# Altium PCB PCB1.PcbDoc
Units mm, origin at the board's own origin, x right, y up, seen from the top; angles counter-clockwise.
Board outline 60 x 25 mm, 2 copper layers (Top Layer, Bottom Layer); 11 components, 6 nets, 39 pads, 15 vias.
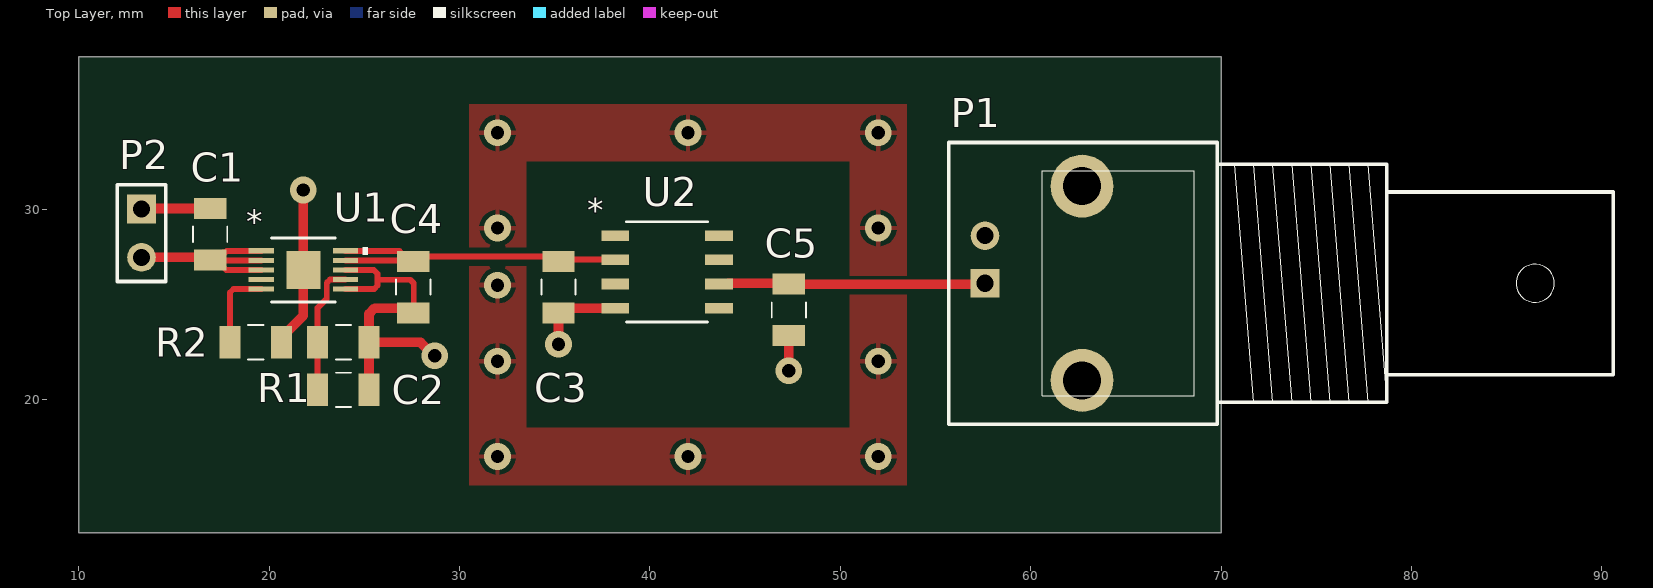
[diagram p0: Top Layer view]
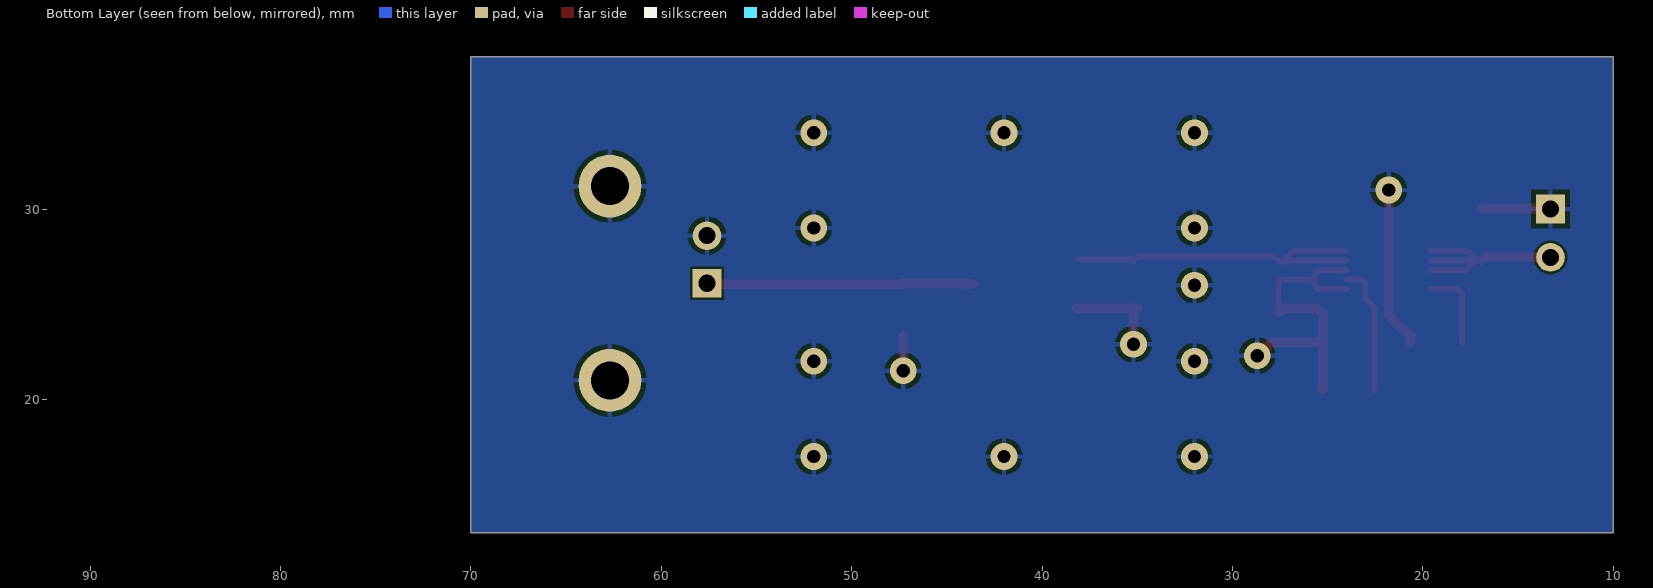
[diagram p1: Bottom Layer view, seen from below]
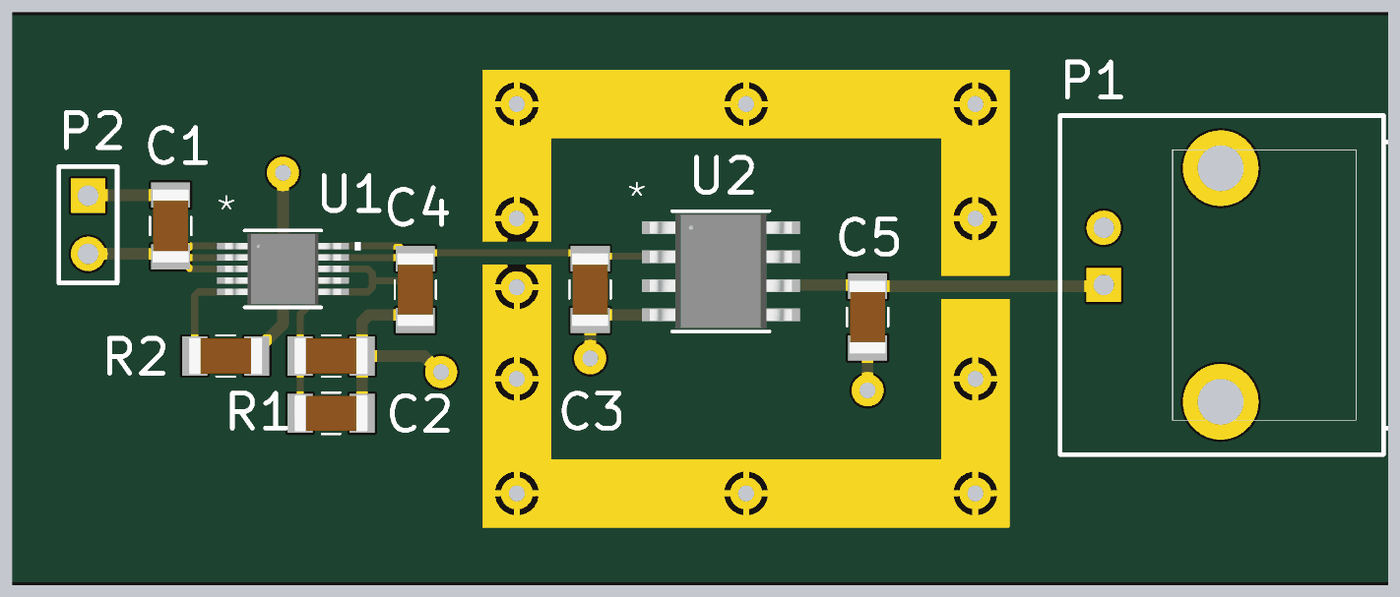
[diagram p2: 3D render of the assembled board from above, using the file's embedded part models]

## Layer stack, top to bottom
Top Solder: solder mask 0.0102, Solder Resist, Dk 3.5
Top Layer: signal copper 0.0356
Dielectric 1: dielectric 0.32, FR-4, Dk 4.8
Bottom Layer: signal copper 0.0356
Bottom Solder: solder mask 0.0102, Solder Resist, Dk 3.5

## Board outline
10,13 70,13 70,38 10,38

## Design rules (kind name [scope] priority, off if disabled: settings)
Clearance [All] p1: gap=0.127 ignorepadtopadclearanceinfootprint=TRUE
PolygonConnect [All] p1: connectstyle=Relief reliefconductorwidth=0.254 reliefentries=4 polygonreliefangle="90 Angle" airgapwidth=0.254
RoutingVias [All] p1: holewidth=0.7 width=1.4 viastyle="Through Hole" minholewidth=0.3 minwidth=0.6 maxholewidth=0.7 maxwidth=1.4
SolderMaskExpansion [All] p1: expansion=0.102 istentingtop=FALSE
Width [All] p1: maxlimit=1.016 minlimit=0.254 preferedwidth=0.305
30 further rules are at their usual default settings.

## Components (designator, comment, footprint, x,y, rotation, side; value= is the part's Value field where it differs from the comment)
C1 "10uF" C1206-KUE 16.9,28.675 r270 top
C2 "4.7uF" C1206-KUE 23.9,23 r180 top
C3 "10uF" C1206-KUE 35.2,25.9 r90 top
C4 "100nF" C1206-KUE 27.575,25.9 r90 top
C5 "100nF" C1206-KUE 47.3,24.7 r90 top
P1 "BNC" "BNC_RA CON" 57.6,26.1 r180 top
P2 "Header 2" HDR1X2 13.3,30 r270 top
R1 "50k" C1206-KUE 23.9,20.5 r0 top
R2 "0" C1206-KUE 19.3,23 r0 top
U1 "LT3042EMSE#TRPBF" 05-08-1664_ADI 21.8,26.8 r0 top
U2 "ADR4540BRZ" R-8_ADI 40.9,26.7 r0 top

## Footprints (in the part's own frame and the unit in brackets; to place one, negate y for a bottom-side part, rotate by r counter-clockwise, add the part's x,y. Pads: shape width x height; smd on the part's side, far side on the other; paste and mask are expansions set on the pad)
05-08-1664_ADI [mil]
  rect 52.28x11 smd paste+0 mask+0: 1(-87.14,39.37) 2(-87.14,19.68) 3(-87.14,0) 4(-87.14,-19.69) 5(-87.14,-39.37) 6(87.14,-39.37) 7(87.14,-19.69) 8(87.14,0) 9(87.14,19.68) 10(87.14,39.37)
  rect 70x78 smd paste+0 mask+0: 11(0,0)
  silkscreen extent -66,-66 133,66, body extent -99,-61 99,61, height 43
"BNC_RA CON" [mm] "Connector; BNC Elbow"
  rect 1.5x1.5 hole 0.9: 1(0,0)
  round 3.3 hole 2: 2(-5.1,5.1) 2(-5.1,-5.1)
  round 1.5 hole 0.9: 2(0,-2.5)
  silkscreen extent -33,-7.4 1.9,7.4
C1206-KUE [mm] "Chip Capacitor, Body 3.2x1.6mm, IPC High Density"
  rect 1.1x1.7 smd: 1(-1.35,0) 2(1.35,0)
  silkscreen extent -0.4,-0.9 0.4,0.9, body extent -1.6,-0.8 1.6,0.8, height 0.95
HDR1X2 [mm] "Connector; Header; 2 Position"
  rect 1.5x1.5 hole 0.9: 1(0,0)
  round 1.5 hole 0.9: 2(2.54,0)
  silkscreen extent -1.27,-1.27 3.81,1.27
R-8_ADI [mil]
  rect 57.5x22 smd paste+0 mask+0: 1(-107.25,75) 2(-107.25,25) 3(-107.25,-25) 4(-107.25,-75) 5(107.25,-75) 6(107.25,-25) 7(107.25,25) 8(107.25,75)
  silkscreen extent -84,-104 84,104, body extent -122,-99 122,99, height 69

## Part data
C1: library part Capacitor, "Capacitor", Manufacturer=Kemet, Bezeichnung="Kerko +-10% 63V", LatestRevisionDate=17-Jul-2002, LatestRevisionNote="Re-released for DXP Platform.", PackageDescription="Radial Cap, Thru-Hole; 2 Leads; 0.3 in Pin Spacing", PackageReference=RAD-0.3, Published=8-Jun-2000, Publisher="Altium Limited"
C2 C3 C4: library part Capacitor, "Capacitor X7R", Manufacturer=Kemet, Bezeichnung="Kerko +-10% 63V", LatestRevisionDate=17-Jul-2002, LatestRevisionNote="Re-released for DXP Platform.", PackageDescription="Radial Cap, Thru-Hole; 2 Leads; 0.3 in Pin Spacing", PackageReference=RAD-0.3, Published=8-Jun-2000, Publisher="Altium Limited"
C5: library part Capacitor, "Capacitor X7r", Manufacturer=Kemet, Bezeichnung="Kerko +-10% 63V", LatestRevisionDate=17-Jul-2002, LatestRevisionNote="Re-released for DXP Platform.", PackageDescription="Radial Cap, Thru-Hole; 2 Leads; 0.3 in Pin Spacing", PackageReference=RAD-0.3, Published=8-Jun-2000, Publisher="Altium Limited"
P1: "BNC Elbow Connector", LatestRevisionDate=17-Jul-2002, LatestRevisionNote="Re-released for DXP Platform.", Publisher="Altium Limited"
P2: "Header, 2-Pin", LatestRevisionDate=17-Jul-2002, LatestRevisionNote="Re-released for DXP Platform.", Publisher="Altium Limited"
R1: library part ResistorSMD, "Resistor SMD 1%", Manufacturer=AVX, Bezeichnung="SMD Wid. 1/8W 2%", LatestRevisionDate=17-Jul-2002, LatestRevisionNote="Re-released for DXP Platform.", PackageDescription="Axial Device, Thru-Hole; 2 Leads; 0.4 in Pin Spacing", PackageReference=AXIAL-0.4, Published=8-Jun-2000, Publisher="Altium Limited"
R2: library part ResistorSMD, "Resistor SMD", Manufacturer=AVX, Bezeichnung="SMD Wid. 1/8W 2%", LatestRevisionDate=17-Jul-2002, LatestRevisionNote="Re-released for DXP Platform.", PackageDescription="Axial Device, Thru-Hole; 2 Leads; 0.4 in Pin Spacing", PackageReference=AXIAL-0.4, Published=8-Jun-2000, Publisher="Altium Limited"
U1: library part LT3042EMSETRPBF, "20V, 200mA, Ultralow Noise, Ultrahigh PSRR RF Linear Regulator", Manufacturer_Name="Analog Devices Inc", Copyright="Copyright (C) 2025 Ultra Librarian. All rights reserved.", Manufacturer_Part_Number=LT3042EMSE#TRPBF, RefDes=RefDes, Type="Power Management"
U2: "Ultra-Low-Noise, High-Accuracy 4.096V Voltage Reference", Manufacturer_Name="Analog Devices Inc", Copyright="Copyright (C) 2025 Ultra Librarian. All rights reserved.", Manufacturer_Part_Number=ADR4540BRZ, RefDes=RefDes, Type="Power Management"

## Via types
v1: diameter 1.4, hole 0.7, Top Layer to Bottom Layer, 15 vias

## Nets (pads, with @x,y where several pads share a name; then routed paths per layer and width w, separated by ;. In a path a pad name is that pad's centre, name@x,y a point inside that pad or via, vN(x,y) a via of type N, cw(c..) or ccw(c..) an arc to the next point about the centre after c; other vN are vias at no path point)
GND: C1.1 C2.1 C3.1 C4.1 C5.1 P1.2 P2.1 R1.2 R2.2 U1.6 U1.8 U1.11 U2.4 | length 36.9
  Top Layer w0.305: U1.6 25.521,25.8 25.7,25.979 25.7,26.289 ; U1.8 25.5,26.8 25.7,26.6 25.7,26.289 ; C4.1 27.6,24.575 27.6,26.1 27.411,26.289 25.7,26.289
  Top Layer w0.508: P2.1 13.325,30.025 C1.1 ; R2.2 20.65,23.3 20.946,23.596 20.996,23.596 21.8,24.4 U1.11 v1(21.8,31) ; R1.2 C2.1 ; C4.1 27.33,24.795 25.548,24.795 25.25,24.497 C2.1 ; v1(28.7,22.3) 28.656,22.3 27.956,23 C2.1 ; C3.1@34.955,24.795 C3.1 v1(35.2,22.9) ; C3.1@35.2,24.795 U2.4 ; v1(47.3,21.5) C5.1
  other v1: 32,17 42,17 52,17 32,22 52,22 32,26 32,29 52,29 32,34 42,34 52,34
NetC1_2: C1.2 P2.2 U1.1 U1.2 U1.3 | length 11.5
  Top Layer w0.305: C1.2 C1.2@17.2,27.325 ; U1.3 17.75,26.8 C1.2@17.25,27.3 ; U1.2 C1.2@17.25,27.3 ; U1.1 17.776,27.8 17.699,27.723 17.573,27.723 17.2,27.35 C1.2@17.25,27.3
  Top Layer w0.508: P2.2 16.765,27.46 C1.2
NetC2_2: C2.2 R1.1 U1.7 | length 6.9
  Top Layer w0.305: R1.1 C2.2 22.55,24.811 23.025,25.286 23.025,26.121 23.204,26.3 U1.7
NetC3_2: C3.2 C4.2 U1.9 U1.10 U2.2 | length 17.9
  Top Layer w0.305: U1.9 C4.2@27.3,27.3 ; U1.10 26.85,27.8 C4.2@27.3,27.35 ; C4.2@27.275,27.25 C4.2 27.825,27.5 34.95,27.5 C3.2 ; C3.2@35.2,27.35 38.161,27.35 U2.2
NetC5_2: C5.2 P1.1 U2.6 | length 14
  Top Layer w0.508: U2.6 44.075,26.065 44.11,26.1 C5.2@47.3,26.1 ; C5.2 57.55,26.05 P1.1
NetR2_1: R2.1 U1.5 | length 4.3
  Top Layer w0.305: R2.1 17.95,25.621 18.129,25.8 U1.5
pads on no net: U1.4 U2.1 U2.3 U2.5 U2.7 U2.8

## Polygon pours and split planes (outlines as drawn)
GND on Top Layer "GND_L01_P006" (solid, pour order 6): 33.5,28 30.5,28 30.5,35.5 53.5,35.5 53.5,26.5 50.5,26.5 50.5,32.5 33.5,32.5
GND on Top Layer "GND_L01_P005" (solid, pour order 5): 30.5,27 33.5,27 33.5,18.5 50.5,18.5 50.5,25.5 53.5,25.5 53.5,15.5 30.5,15.5
GND on Bottom Layer "GND_L02_P000" (solid, pour order 0): 70,38 10,38 10,13 70,13
GND on Top Solder "GND_L01_P004" (solid, pour order 4): 33.5,28 30.5,28 30.5,35.5 53.5,35.5 53.5,26.5 50.5,26.5 50.5,32.5 33.5,32.5
GND on Top Solder "GND_L01_P003" (solid, pour order 3): 30.5,27 33.5,27 33.5,18.5 50.5,18.5 50.5,25.5 53.5,25.5 53.5,15.5 30.5,15.5

## Silkscreen, mask and mechanical layers (free items; w line width, h text height)
Mechanical 1:
  the board outline again, w0.254

## Dimensions
70,13 to 10,38 on Top Solder
70,13 to 10,38 on Top Solder

## Text inside footprints (layer, text, board x,y; h text height)
U1: Top Overlay "*" at 18.8,28.7 h1.27; Mechanical 13 "*" at 20.314,27.003 h1.27
U2: Top Overlay "*" at 36.7,29.3 h1.27; Mechanical 13 "*" at 38.97,27.856 h1.27